# EAGLE board ttab (EAGLE 6.3)
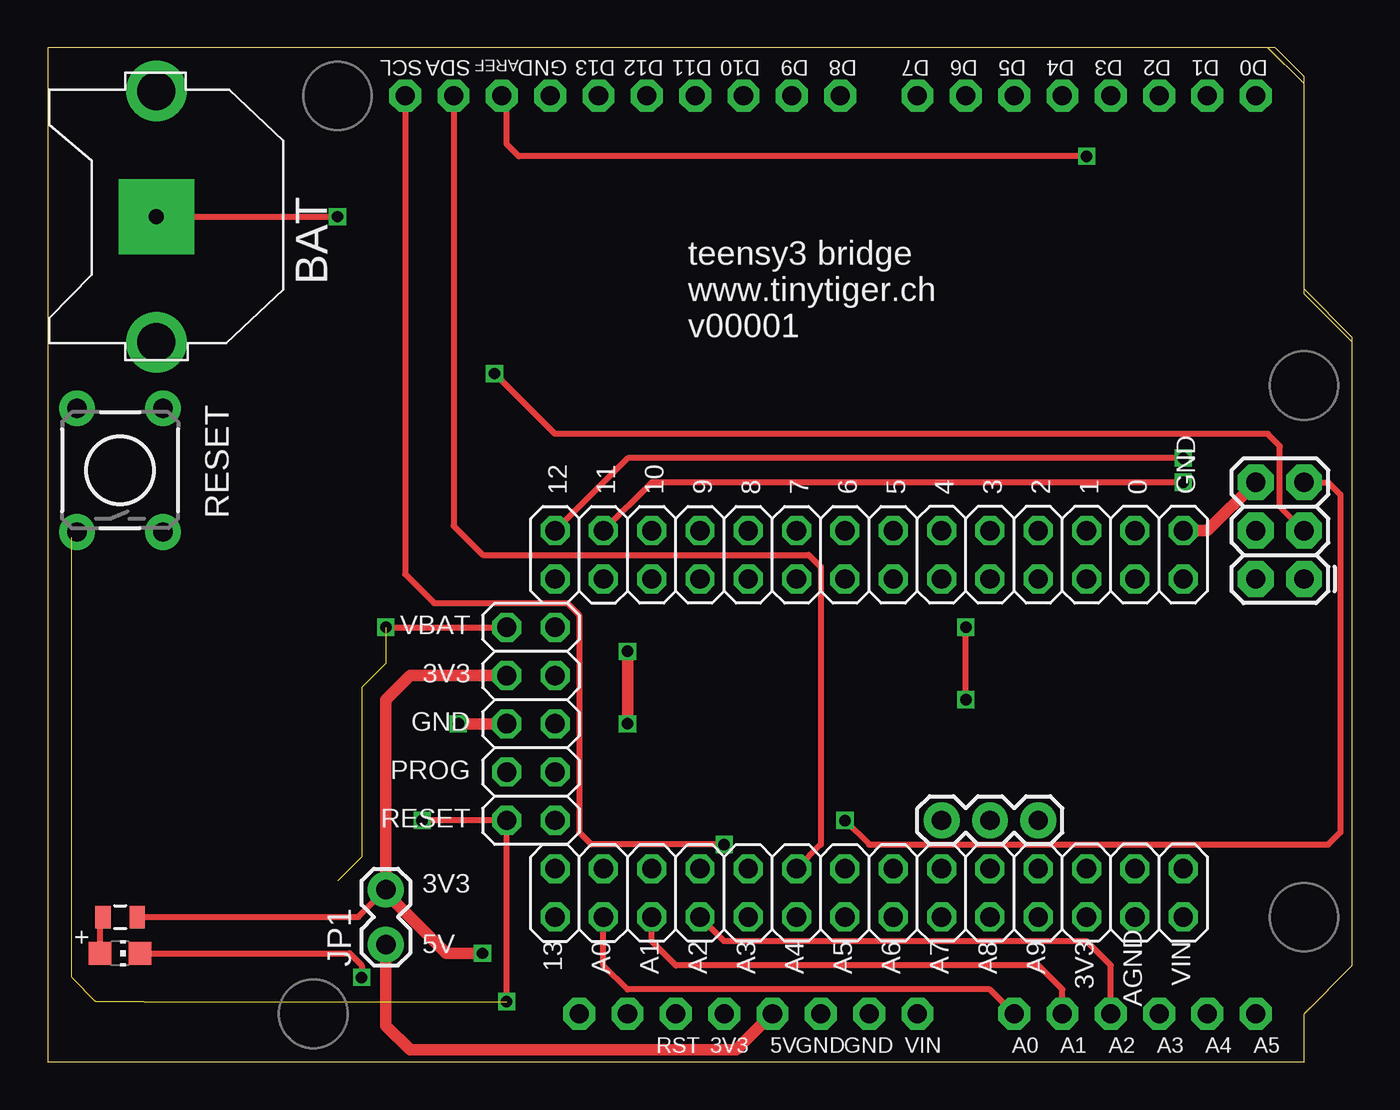
[diagram p0: board, top side]
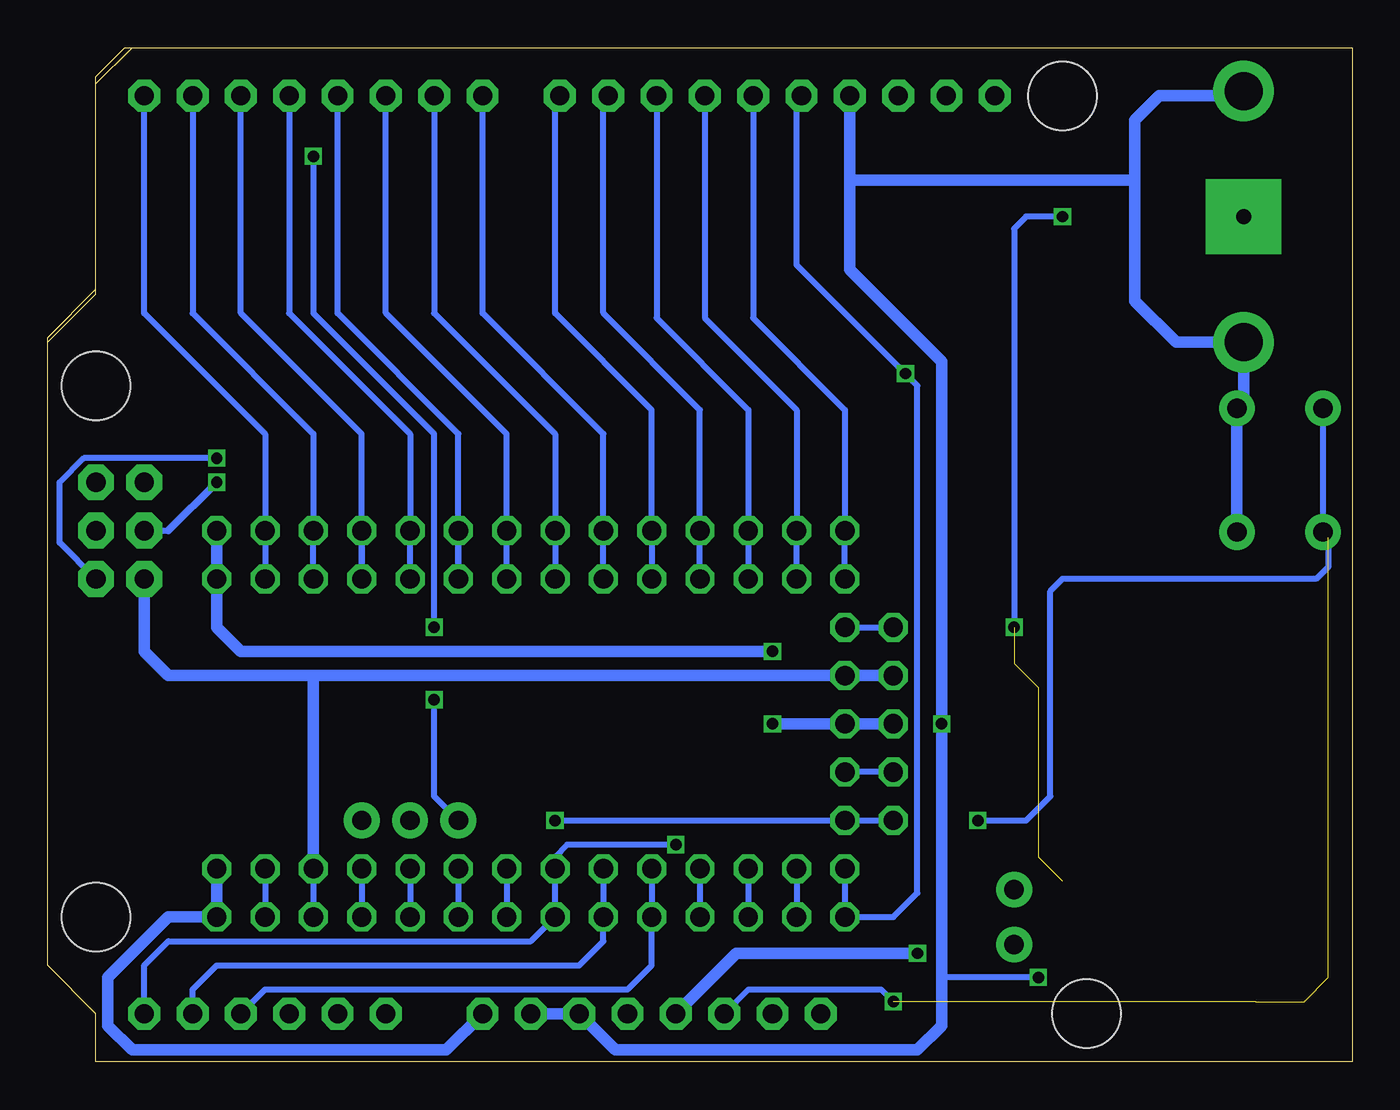
[diagram p1: board, bottom side, seen from below]

Size 68.58 x 53.34 mm. Coordinates in mm from the lower left corner, seen from the top.
Outline: 0,0 66.04,0 66.04,2.54 68.58,5.08 68.58,38.1 66.04,40.64 66.04,51.44 64.14,53.34 0,53.34 0,0
Copper layers (1*16): Top 0.035mm / dielectric 1.5mm / Bottom 0.035mm
Design rules "ITEADstudio_DRC": minimum track width 6mil, minimum drill 12mil, track to track 6mil, track to pad 6mil, pad to pad 6mil, via to via 6mil, smd to smd 0mil, copper to edge 10mil, drill to drill 10mil, minimum pad ring 10mil, minimum via ring 6mil, stop-mask expansion 2mil, vias tented up to drill 100mil, thermal gap 10mil
Holes 3.6 mm at 15.24,50.8 66.04,35.56 66.04,7.62 13.97,2.54

## Footprints (pad centres in the part's own frame; a part is rotated, then mirrored left to right if it is on the bottom)
2X3 = drill 1.016 pad 1.88 octagon: 1 0,0; 2 0,2.54; 3 2.54,0; 4 2.54,2.54; 5 5.08,0; 6 5.08,2.54
CR1220-THM = drill 2 pad 3.175: +1 -6.604,0; +2 6.604,0 | drill 0.8 pad 3.962 square: - 0,0
1X02_LOCK = drill 1.016 pad 1.88: 1 -0.178,0; 2 2.718,0
1X03 = drill 1.016 pad 1.88: 1 0,0; 2 2.54,0; 3 5.08,0
2X14 = drill 1.016 octagon: 1 -16.51,-1.27; 2 -16.51,1.27; 3 -13.97,-1.27; 4 -13.97,1.27; 5 -11.43,-1.27; 6 -11.43,1.27; 7 -8.89,-1.27; 8 -8.89,1.27; 9 -6.35,-1.27; 10 -6.35,1.27; 11 -3.81,-1.27; 12 -3.81,1.27; 13 -1.27,-1.27; 14 -1.27,1.27; 15 1.27,-1.27; 16 1.27,1.27; 17 3.81,-1.27; 18 3.81,1.27; 19 6.35,-1.27; 20 6.35,1.27; 21 8.89,-1.27; 22 8.89,1.27; 23 11.43,-1.27; 24 11.43,1.27; 25 13.97,-1.27; 26 13.97,1.27; 27 16.51,-1.27; 28 16.51,1.27
CHIP-LED0805 = smd 1.2 x 1.2: A 0,-1.05; C 0,1.05
0805 = smd 0.8 x 1.2: 1 -0.9,0; 2 0.9,0
TACTILE-PTH = drill 1.016 pad 1.88: 1 -3.251,2.261; 2 3.251,2.261; 3 -3.251,-2.261; 4 3.251,-2.261
2X05 = drill 1.016 octagon: 1 -5.08,-1.27; 2 -5.08,1.27; 3 -2.54,-1.27; 4 -2.54,1.27; 5 0,-1.27; 6 0,1.27; 7 2.54,-1.27; 8 2.54,1.27; 9 5.08,-1.27; 10 5.08,1.27
ARDUINOR3 = drill 1 pad 1.676 octagon: 3V 35.56,2.54; 5V 38.1,2.54; A0 50.8,2.54; A1 53.34,2.54; A2 55.88,2.54; A3 58.42,2.54; A4 60.96,2.54; A5 63.5,2.54; AREF 23.876,50.8; D0 63.5,50.8; D1 60.96,50.8; D2 58.42,50.8; D3 55.88,50.8; D4 53.34,50.8; D5 50.8,50.8; D6 48.26,50.8; D7 45.72,50.8; D8 41.656,50.8; D9 39.116,50.8; D10 36.576,50.8; D11 34.036,50.8; D12 31.496,50.8; D13 28.956,50.8; GND 26.416,50.8; GND1 43.18,2.54; GND2 40.64,2.54; IOREF 30.48,2.54; RESERVED 27.94,2.54; RESET 33.02,2.54; SCL 18.796,50.8; SDA 21.336,50.8; VIN 45.72,2.54

## Placement (x,y rotation side)
AVRISP  [2X3]  66.04,25.4 90 top
BAT  [CR1220-THM]  5.71,44.45 90 top
JP1  [1X02_LOCK]  17.78,6.35 90 top
JP3  [1X03]  52.07,12.7 180 top
JP4  [2X14]  43.18,26.67 180 top
JP5  [2X14]  43.18,8.89 180 top
LED1  [CHIP-LED0805]  3.81,5.71 270 top
R1  [0805]  3.81,7.62 0 top
RESET  [TACTILE-PTH]  3.81,31.11 90 top
SV1  [2X05]  25.4,17.78 270 top
U4  ARDUINOR3-DIMENSION  [ARDUINOR3]  0,0 0 top

## Library data of the parts
AVRISP JP1 JP3 = SparkFun-Connectors
BAT JP4 JP5 LED1 = adafruit
R1 = SparkFun-Passives
RESET = SparkFun-Electromechanical
SV1 = pinhead
U4 = thewknd

## Nets
3V3: AVRISP.2 JP1.2 JP5.5 JP5.6 R1.2 SV1.3 SV1.4 U4.3V
5V: JP1.1 U4.5V
A0: JP5.25 JP5.26 U4.A0
A1: JP5.23 JP5.24 U4.A1
A2: JP5.21 JP5.22 U4.A2
A3: JP5.19 JP5.20 U4.A3
A4: JP5.17 JP5.18 U4.A4 U4.SDA
A5: JP5.15 JP5.16 U4.A5 U4.SCL
AGND: JP5.3 JP5.4
AREF: JP3.3 U4.AREF
D0: JP4.3 JP4.4 U4.D0
D1: JP4.5 JP4.6 U4.D1
D2: JP4.7 JP4.8 U4.D2
D3: JP4.9 JP4.10 U4.D3
D4: JP4.11 JP4.12 U4.D4
D5: JP4.13 JP4.14 U4.D5
D6: JP4.15 JP4.16 U4.D6
D7: JP4.17 JP4.18 U4.D7
D8: JP4.19 JP4.20 U4.D8
D9: JP4.21 JP4.22 U4.D9
D10: JP4.23 JP4.24 U4.D10
D11: AVRISP.4 JP4.25 JP4.26 U4.D11
D12: AVRISP.1 JP4.27 JP4.28 U4.D12
D13: AVRISP.3 JP5.27 JP5.28 U4.D13
D20: JP5.13 JP5.14
D21: JP5.11 JP5.12
D22: JP5.9 JP5.10
D23: JP5.7 JP5.8
GND: AVRISP.6 BAT.+1 BAT.+2 JP4.1 JP4.2 LED1.C RESET.3 RESET.4 SV1.5 SV1.6 U4.GND U4.GND1 U4.GND2
N$1: LED1.A R1.1
PROG: SV1.7 SV1.8
RESET: AVRISP.5 RESET.1 RESET.2 SV1.9 SV1.10 U4.RESET
VBAT: BAT.- SV1.1 SV1.2
VIN: JP5.1 JP5.2 U4.VIN

## Tracks (layer width: path | path; a pad name or v marks a point on that pad's centre or on a via)
3V3  (via drill 0.6)
  Top 0.305: R1.2 16.33,7.62 JP1.2
  Top 0.61: SV1.3 19.05,20.32 17.78,19.05 JP1.2 17.78,8.89 20.95,5.71 v22.86,5.71
  Bottom 0.305: JP5.5 JP5.6
  Bottom 0.61: SV1.3 SV1.4 54.61,20.32 | AVRISP.2 63.5,21.59 62.23,20.32 54.61,20.32 | JP5.5 54.61,20.32 | v22.86,5.71 32.38,5.71 U4.3V
5V
  Top 0.61: JP1.1 17.78,1.91 19.05,0.64 36.2,0.64 U4.5V
  Bottom 0.305: U4.5V 38.28,2.54
A0
  Top 0.305: U4.A0 49.53,3.81 30.48,3.81 29.21,5.08 JP5.26
  Bottom 0.305: JP5.25 JP5.26
A1
  Top 0.305: U4.A1 53.34,3.81 52.07,5.08 33.02,5.08 31.75,6.35 JP5.24
  Bottom 0.305: JP5.23 JP5.24
A2
  Top 0.305: U4.A2 55.88,5.08 54.61,6.35 35.56,6.35 JP5.22
  Bottom 0.305: JP5.21 JP5.22
A3
  Bottom 0.305: JP5.19 JP5.20 36.83,5.08 38.1,3.81 57.15,3.81 U4.A3
A4
  Top 0.305: U4.SDA 21.34,28.19 22.86,26.67 40.01,26.67 40.64,26.04 40.64,11.43 JP5.17
  Bottom 0.305: JP5.17 JP5.18 39.37,6.35 40.64,5.08 59.69,5.08 60.96,3.81 U4.A4
A5  (via drill 0.6)
  Top 0.305: U4.SCL 18.8,25.65 20.32,24.13 27.3,24.13 27.94,23.5 27.94,12.06 28.57,11.43 v35.56,11.43
  Bottom 0.305: U4.A5 63.5,5.08 62.23,6.35 43.18,6.35 JP5.16 JP5.15 41.91,10.79 41.27,11.43 v35.56,11.43
AGND
  Bottom 0.305: JP5.3 JP5.4
AREF  (via drill 0.6)
  Top 0.305: v54.61,47.62 24.77,47.62 24.13,48.26 24.13,50.55 U4.AREF | v48.26,19.05 v48.26,22.86
  Bottom 0.305: v54.61,47.62 54.61,39.37 48.26,33.02 v48.26,22.86 | JP3.3 48.26,13.97 v48.26,19.05
D0
  Bottom 0.305: JP4.4 JP4.3 57.15,33.02 63.5,39.37 U4.D0
D1
  Bottom 0.305: JP4.6 JP4.5 54.61,33.02 60.96,39.37 U4.D1
D2
  Bottom 0.305: JP4.7 JP4.8 52.07,33.02 58.42,39.37 U4.D2
D3
  Bottom 0.305: JP4.10 JP4.9 49.53,33.02 55.88,39.37 U4.D3
D4
  Bottom 0.305: JP4.11 JP4.12 46.99,33.02 53.34,39.37 U4.D4
D5
  Bottom 0.305: JP4.13 JP4.14 44.45,33.02 50.8,39.37 U4.D5
D6
  Bottom 0.305: JP4.16 JP4.15 41.91,33.02 48.26,39.37 U4.D6
D7
  Bottom 0.305: JP4.17 JP4.18 39.37,33.02 45.72,39.37 U4.D7
D8
  Bottom 0.305: JP4.20 JP4.19 36.83,34.29 41.91,39.37 41.91,50.55 U4.D8
D9
  Bottom 0.305: JP4.22 JP4.21 34.29,34.29 39.37,39.37 39.37,50.55 U4.D9
D10
  Bottom 0.305: JP4.24 JP4.23 31.75,34.29 36.58,39.12 U4.D10
D11  (via drill 0.6)
  Top 0.305: v59.69,30.48 31.75,30.48 JP4.25
  Bottom 0.305: JP4.26 JP4.25 29.21,34.29 34.04,39.12 U4.D11 | AVRISP.4 62.23,27.94
  Bottom 0.406: 62.23,27.94 v59.69,30.48
D12  (via drill 0.6)
  Top 0.305: v59.69,31.75 30.48,31.75 JP4.27
  Bottom 0.305: JP4.28 JP4.27 26.67,34.29 31.5,39.12 U4.D12 | v59.69,31.75 66.67,31.75 67.94,30.48 67.94,27.3 AVRISP.1
D13  (via drill 0.6)
  Top 0.305: AVRISP.3 64.77,29.21 64.77,32.38 64.14,33.02 26.67,33.02 v23.5,36.2
  Bottom 0.305: JP5.27 JP5.28 24.13,7.62 22.86,8.89 22.86,35.56 v23.5,36.2 29.21,41.91 29.21,50.55 U4.D13
D20
  Bottom 0.305: JP5.13 JP5.14
D21
  Bottom 0.305: JP5.11 JP5.12
D22
  Bottom 0.305: JP5.9 JP5.10
D23
  Bottom 0.305: JP5.7 JP5.8
GND  (via drill 0.6)
  Top 0.305: LED1.C 15.88,5.71 16.51,5.08 v16.51,4.45
  Top 0.61: JP4.1 60.96,27.94 AVRISP.6 | v30.48,17.78 v30.48,21.59 | SV1.5 v21.59,17.78
  Bottom 0.305: v16.51,4.45 21.59,4.45
  Bottom 0.61: U4.GND1 U4.GND2 38.73,0.64 22.86,0.64 21.59,1.91 21.59,4.45 v21.59,17.78 21.59,36.83 26.42,41.66 26.42,46.35 | U4.GND 26.42,46.35 | JP4.1 JP4.2 59.69,22.86 58.42,21.59 v30.48,21.59 | 11.43,46.35 26.42,46.35 | 11.43,46.35 11.43,40.01 9.27,37.85 BAT.+1 5.71,34.72 RESET.4 RESET.3 | 11.43,46.35 11.43,49.53 10.16,50.8 5.97,50.8 BAT.+2 | v30.48,17.78 SV1.6 SV1.5
N$1
  Top 0.305: LED1.A 2.76,7.47 R1.1
PROG
  Bottom 0.305: SV1.7 SV1.8
RESET  (via drill 0.6)  (4 unrouted)
  Top 0.305: AVRISP.5 67.31,30.48 67.94,29.84 67.94,12.06 67.31,11.43 43.18,11.43 v41.91,12.7 | v24.13,3.17 SV1.9 v19.68,12.7
  Bottom 0.305: SV1.9 SV1.10 v41.91,12.7 | U4.RESET 31.75,3.81 24.77,3.81 v24.13,3.17 | RESET.2 RESET.1 | 1.27,27.58 1.27,26.04 1.91,25.4 15.24,25.4 15.88,24.77 15.88,13.97 17.14,12.7 v19.68,12.7
VBAT  (via drill 0.6)  (4 unrouted)
  Top 0.305: v17.78,22.86 SV1.1 | BAT.- v15.24,44.45
  Bottom 0.305: SV1.2 SV1.1 | v15.24,44.45 17.14,44.45 17.78,43.81 v17.78,22.86
VIN
  Bottom 0.61: U4.VIN 47.62,0.64 64.14,0.64 65.41,1.91 65.41,4.45 62.23,7.62 JP5.2 JP5.1

## Text on the board
tNames: SCL | SDA | AREF | GND | D13 | D12 | D11 | D10 | D9 | D8 | D7 | D6 | D5 | D4 | D3 | D2 | D1 | D0 | teensy3 bridge | www.tinytiger.ch | v00001 | 12 | 11 | 10 | 9 | 8 | 7 | 6 | 5 | 4 | 3 | 2 | 1 | 0 | GND | VBAT | 3V3 | GND | PROG | RESET | 3V3 | AGND | 5V | 13 | A0 | A1 | A2 | A3 | A4 | A5 | A6 | A7 | A8 | A9 | 3V3 | VIN | RST | 3V3 | 5V | GND | GND | VIN | A0 | A1 | A2 | A3 | A4 | A5